# EAGLE board ALL IN ONE (EAGLE 5.01)
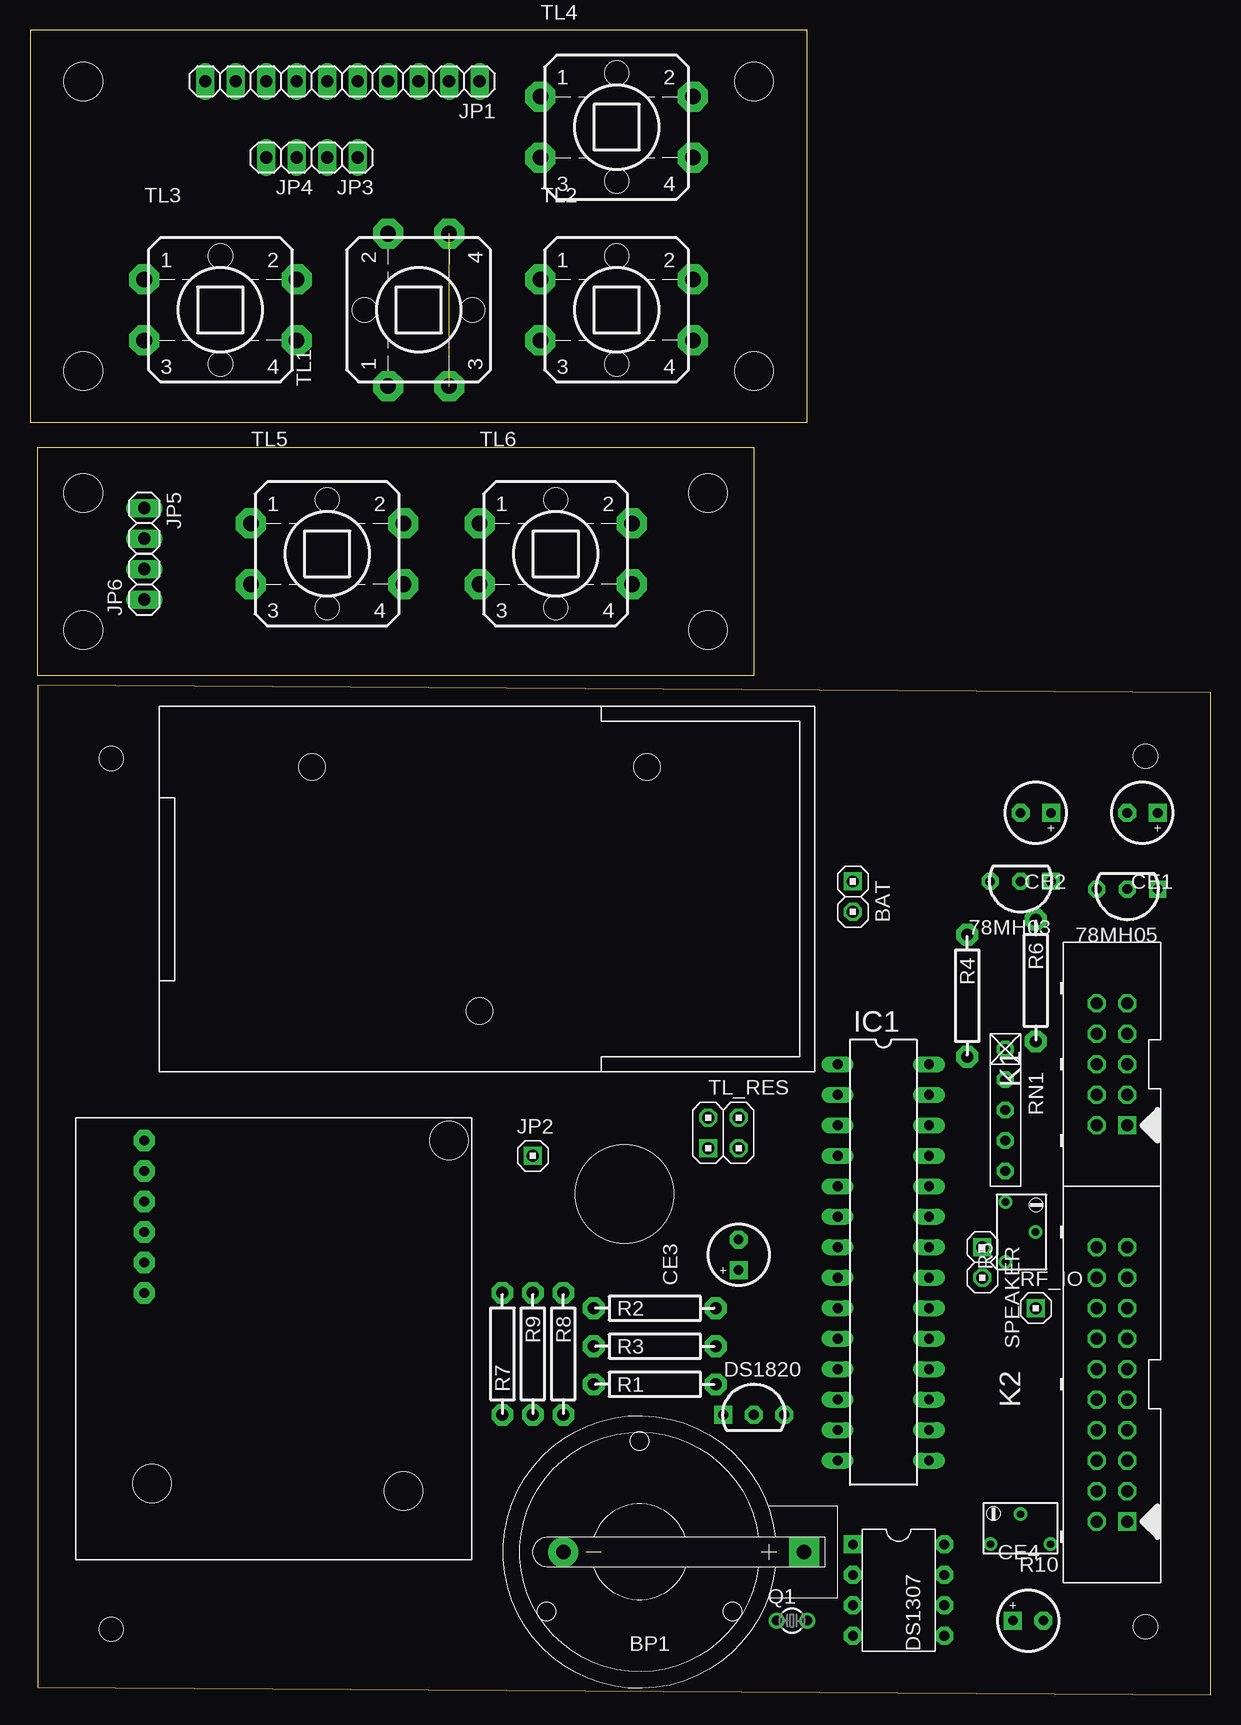
[diagram p0: board, top side]
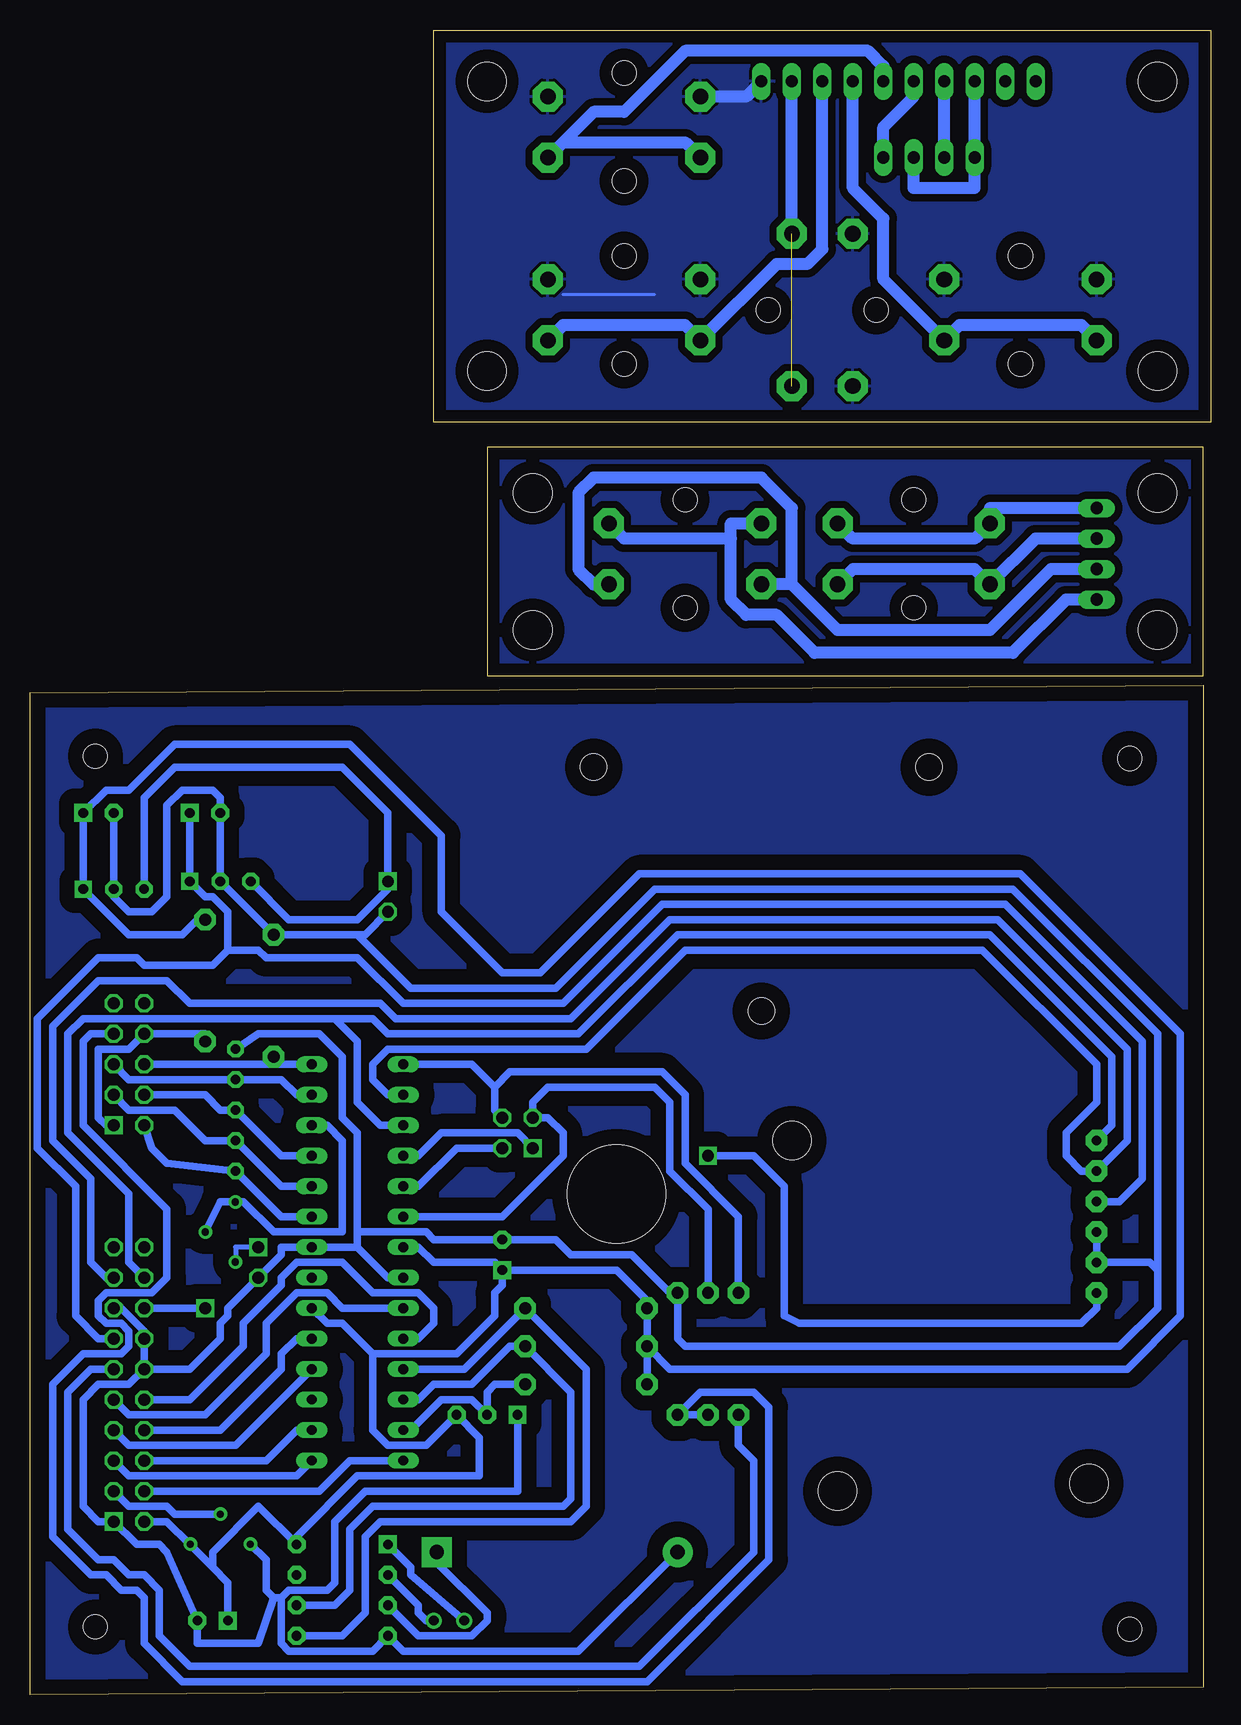
[diagram p1: board, bottom side, seen from below]

Size 98.41 x 138.74 mm. Coordinates in mm from the lower left corner, seen from the top.
Outline: 0.64,0.64 98.41,0 98.41,83.49 0.64,84.12 0.64,0.64
Outline: 0,106.04 64.75,106.04 64.75,138.74 0,138.74 0,106.04
Outline: 0.63,103.97 60.32,103.97 60.32,84.92 0.63,84.92 0.63,103.97
Copper layers (1*16): Top 0.035mm / dielectric 1.5mm / Bottom 0.035mm
Design rules "default": minimum track width 10mil, minimum drill 24mil, track to track 8mil, track to pad 8mil, pad to pad 8mil, via to via 8mil, smd to smd 8mil, copper to edge 40mil, drill to drill 8mil, minimum pad ring 10mil, minimum via ring 8mil, stop-mask expansion 4mil, vias tented up to drill 0mil, thermal gap 10mil
Net classes: 0 default: width 1 mm
Holes 8.2 mm at 49.52,41.74
Holes 2 mm at 6.76,5.47 6.76,78.02 92.97,5.67 92.97,78.22
Holes 3.2 mm at 4.44,110.32 4.44,134.46 60.32,134.46 60.32,110.32 4.44,100.16 4.44,88.73 56.51,100.16 56.51,88.73

## Footprints (pad centres in the part's own frame; a part is rotated, then mirrored left to right if it is on the bottom)
TO-92B = drill 0.813 pad 1.422 square: 1 -2.54,0 | drill 0.813 pad 1.422 octagon: 2 0,0; 3 2.54,0
1X02 = drill 0.991 pad 1.499 square: 1 -1.27,0 | drill 0.991 pad 1.499 octagon: 2 1.27,0
B_BH2032 = drill 1.2 pad 2.5 square: B+ -13.716,0 | drill 1.2 pad 2.5 round: B- 6.35,0
CR05_2,5 = drill 0.813 pad 1.499 square: 1 -1.27,0 | drill 0.813 pad 1.499 octagon: 2 1.27,0
DIL-08 = drill 0.813 pad 1.499 square: 1 -3.81,-3.81 | drill 0.813 pad 1.499 octagon: 2 -1.27,-3.81; 3 1.27,-3.81; 4 3.81,-3.81; 5 3.81,3.81; 6 1.27,3.81; 7 -1.27,3.81; 8 -3.81,3.81
TO-92B' = drill 0.813 pad 1.499 square: 1 -2.54,0 | drill 0.813 pad 1.499 octagon: 2 0,0; 3 2.54,0
DIL28-3 = drill 0.813 long: 1 -16.51,-3.81; 2 -13.97,-3.81; 3 -11.43,-3.81; 4 -8.89,-3.81; 5 -6.35,-3.81; 6 -3.81,-3.81; 7 -1.27,-3.81; 8 1.27,-3.81; 9 3.81,-3.81; 10 6.35,-3.81; 11 8.89,-3.81; 12 11.43,-3.81; 13 13.97,-3.81; 14 16.51,-3.81; 15 16.51,3.81; 16 13.97,3.81; 17 11.43,3.81; 18 8.89,3.81; 19 6.35,3.81; 20 3.81,3.81; 21 1.27,3.81; 22 -1.27,3.81; 23 -3.81,3.81; 24 -6.35,3.81; 25 -8.89,3.81; 26 -11.43,3.81; 27 -13.97,3.81; 28 -16.51,3.81
1X10 = drill 1.016 long: 1 -11.43,0; 2 -8.89,0; 3 -6.35,0; 4 -3.81,0; 5 -1.27,0; 6 1.27,0; 7 3.81,0; 8 6.35,0; 9 8.89,0; 10 11.43,0
1X01 = drill 0.991 pad 1.499 square: 1 0,0
1X02' = drill 1.016 long: 1 -1.27,0; 2 1.27,0
LH-10 = drill 0.991 pad 1.499 square: 1 -5.08,-1.27 | drill 0.991 pad 1.499 octagon: 2 -5.08,1.27; 3 -2.54,-1.27; 4 -2.54,1.27; 5 0,-1.27; 6 0,1.27; 7 2.54,-1.27; 8 2.54,1.27; 9 5.08,-1.27; 10 5.08,1.27
LH-20 = drill 1 pad 1.499 square: 1 -11.43,-1.27 | drill 1 pad 1.499 octagon: 2 -11.43,1.27; 3 -8.89,-1.27; 4 -8.89,1.27; 5 -6.35,-1.27; 6 -6.35,1.27; 7 -3.81,-1.27; 8 -3.81,1.27; 9 -1.27,-1.27; 10 -1.27,1.27; 11 1.27,-1.27; 12 1.27,1.27; 13 3.81,-1.27; 14 3.81,1.27; 15 6.35,-1.27; 16 6.35,1.27; 17 8.89,-1.27; 18 8.89,1.27; 19 11.43,-1.27; 20 11.43,1.27
TC26V = drill 0.813 round: 1 -1.27,0; 2 1.27,0
R2_10S = drill 0.991 pad 1.803 octagon: 1 -5.08,0; 2 5.08,0
RTRIM74W = drill 0.61 round: 1 -1.25,-2.5; 2 1.25,0; 3 -1.25,2.5
RN-5 = drill 0.813 pad 1.397 octagon: 1 -5.08,0; 2 -2.54,0; 3 0,0; 4 2.54,0; 5 5.08,0
TL-BOPLA = drill 1.3 pad 2.5 octagon: 1 -6.35,2.54; 2 6.35,2.54; 3 -6.35,-2.54; 4 6.35,-2.54 | hole 2: 0,4.5; 0,-4.5
2X02 = drill 0.991 pad 1.499 square: 1 -1.27,-1.27 | drill 0.991 pad 1.499 octagon: 2 -1.27,1.27; 3 1.27,-1.27; 4 1.27,1.27
BAT = hole 2.2: 26.67,5.08; 12.7,25.4; 40.64,25.4
BT_PL = drill 0.8 pad 1.778 octagon: 1 14.605,5.715; 2 12.065,5.715; 3 9.525,5.715; 4 6.985,5.715; 5 4.445,5.715; 6 1.905,5.715 | hole 3.2: 1.905,31.115; 30.48,6.35; 31.115,27.305

## Placement (x,y rotation side)
78MH03  [TO-92B]  82.55,67.78 180 top
78MH05  [TO-92B]  91.44,67.14 180 top
BAT  [1X02]  68.58,66.51 270 top
BP1  [B_BH2032]  50.79,11.9 180 top
CE1  [CR05_2,5]  92.7,73.49 180 top
CE2  [CR05_2,5]  83.81,73.49 180 top
CE3  [CR05_2,5]  59.05,36.66 90 top
CE4  [CR05_2,5]  83.18,6.18 0 top
DS1307  DS1307  [DIL-08]  72.39,8.73 270 top
DS1820  DS1820  [TO-92B']  60.32,23.33 0 top
IC1  MEGA8-P  [DIL28-3]  71.12,36.03 270 top
JP1  [1X10]  26.03,134.46 180 top
JP2  [1X01]  41.9,44.92 0 top
JP3  [1X02']  26.03,128.11 180 top
JP4  [1X02']  20.95,128.11 180 top
JP5  [1X02']  9.52,97.62 270 top
JP6  [1X02']  9.52,92.54 90 top
K1  [LH-10]  90.17,52.54 90 top
K2  [LH-20]  90.17,25.87 90 top
Q1  [TC26V]  63.49,6.18 0 top
R1  [R2_10S]  52.06,25.87 0 top
R2  [R2_10S]  52.06,32.22 0 top
R3  [R2_10S]  52.06,29.05 0 top
R4  [R2_10S]  78.1,58.26 270 top
R5  [RTRIM74W]  82.55,38.57 0 top
R6  [R2_10S]  83.81,59.52 270 top
R7  [R2_10S]  39.36,28.41 90 top
R8  [R2_10S]  44.45,28.41 270 top
R9  [R2_10S]  41.9,28.41 270 top
R10  [RTRIM74W]  82.55,13.81 90 top
RF_IO  [1X01]  83.81,32.22 0 top
RN1  [RN-5]  81.28,48.73 270 top
SPEAKER  [1X02]  79.37,36.03 270 top
TL1  [TL-BOPLA]  32.38,115.4 90 top
TL2  [TL-BOPLA]  48.89,115.4 0 top
TL3  [TL-BOPLA]  15.87,115.4 0 top
TL4  [TL-BOPLA]  48.89,130.65 0 top
TL5  [TL-BOPLA]  24.76,95.08 0 top
TL6  [TL-BOPLA]  43.81,95.08 0 top
TL_RES  [2X02]  57.78,46.83 0 top
U$10  BAT  [BAT]  10.79,51.91 0 top
U$11  BT_PL  [BT_PL]  3.81,48.09 270 top

## Library data of the parts
78MH03 78MH05 = !LINEAR
BAT JP2 K1 K2 RF_IO SPEAKER TL_RES = !PINHEAD
BP1 TL1-TL6 = !ELMECH
CE1-CE4 R1-R4 R6-R9 RN1 = !DISCRET
DS1307 DS1820 U$10 U$11 = _dallas
IC1 = atmel
JP1 JP3-JP6 = pinhead
Q1 = crystal
R5 R10 = rcl

## Nets
+: BP1.B+ DS1307.3
GND: 78MH03.2 78MH05.2 BAT.2 BP1.B- CE1.2 CE2.2 CE3.2 CE4.2 DS1307.4 DS1820.1 IC1.8 IC1.22 K2.1 K2.12 K2.14 K2.15 R4.1 R8.1 R10.3 RN1.1 SPEAKER.2 U$11.2 U$11.3
N$1: 78MH03.3 78MH05.3 BAT.1
N$3: IC1.26 R5.2 R5.3
N$4: 78MH03.1 CE2.1 K2.13 U$11.4
N$5: DS1820.2 IC1.13 R1.2
N$6: K1.7 R8.2 R9.2
N$7: K2.3 R10.2
N$8: IC1.1 R7.2 TL_RES.4
N$9: DS1307.1 Q1.1
N$10: DS1307.2 Q1.2
N$11: K2.11 R7.1
N$12: K1.1 K1.8 R6.2
N$13: DS1307.6 IC1.12 R3.2
N$14: DS1307.5 IC1.11 R2.2
N$15: K2.16 RF_IO.1
N$16: IC1.2 K2.17 U$11.5
N$17: IC1.3 K2.18 U$11.6
N$18: IC1.6 R9.1 TL_RES.2
N$19: JP1.1 TL1.1 TL1.2 TL2.1 TL2.2 TL3.1 TL3.2 TL4.1 TL4.2
N$20: R5.1 SPEAKER.1
N$21: IC1.4 TL_RES.1
N$22: JP2.1 U$11.1
N$23: IC1.5 TL_RES.3
N$24: JP1.2 TL1.3 TL1.4
N$25: JP1.3 TL2.3 TL2.4
N$26: JP1.4 TL3.3 TL3.4
N$27: JP1.5 TL4.3 TL4.4
N$28: JP1.6 JP3.1
N$29: JP1.7 JP4.1
N$30: JP1.8 JP3.2 JP4.2
N$31: JP5.1 TL5.1 TL5.2
N$32: JP5.2 TL5.3 TL5.4
N$33: JP6.1 TL6.1 TL6.2
N$34: JP6.2 TL6.3 TL6.4
PB0: IC1.14 K2.4
PB1: IC1.15 K2.5
PB2: IC1.16 K2.6
PB4: IC1.18 K2.7
PB5: IC1.19 K2.8
PB6: IC1.9 K2.9
PB7: IC1.10 K2.10
PC0: IC1.23 K1.2 RN1.5
PC1: IC1.24 K1.3 RN1.4
PC2: IC1.25 K1.4 RN1.3
PC4: IC1.27 K1.5 RN1.2
PC5: IC1.28 K1.6 R4.2
VCC: 78MH05.1 CE1.1 CE3.1 CE4.1 DS1307.8 DS1820.3 IC1.7 IC1.20 K2.2 R1.1 R2.1 R3.1 R6.1 R10.1

## Tracks (layer width: path | path; a pad name or v marks a point on that pad's centre or on a via)
+
  Bottom 0.61: DS1307.3 66.04,4.92 61.59,4.92 60.32,6.18 60.32,6.82 64.51,11.01 BP1.B+
GND
  Bottom 0.61: IC1.8 68.58,34.76 71.12,37.3 | 71.12,37.3 IC1.22 76.2,37.3 | K2.12 90.17,25.87 92.7,25.87 93.98,24.6 93.98,15.71 92.7,14.44 K2.1 89.53,12.54 87.62,12.54 86.99,11.9 CE4.2 84.45,4.28 79.37,4.28 78.1,8.09 | K2.12 85.09,27.14 82.55,29.68 82.55,30.95 81.91,31.59 81.91,32.22 SPEAKER.2 77.47,36.66 77.47,37.3 76.2,37.3 | K2.12 K2.14 88.9,30.32 90.8,32.22 K2.15 | 76.2,37.3 73.66,37.3 | 71.12,38.57 71.12,37.3 | 71.12,38.57 71.12,46.83 72.39,48.09 72.39,53.18 74.29,55.08 79.37,55.08 RN1.1 | 71.12,38.57 65.4,38.57 64.77,37.94 CE3.2 54.6,37.94 53.34,36.66 48.25,36.66 45.08,33.49 | DS1820.1 57.78,16.98 70.48,16.98 73.02,14.44 73.02,9.36 73.66,8.73 76.83,8.73 77.47,8.09 | CE1.2 78MH05.2 91.44,66.51 90.17,65.24 88.26,65.24 86.99,66.51 86.99,74.13 85.72,75.4 83.18,75.4 82.55,74.77 CE2.2 78MH03.2 R4.1 71.12,63.34 | 71.12,63.34 66.67,58.89 54.6,58.89 46.35,67.14 16.51,67.14 4.44,55.08 4.44,35.4 | 4.44,35.4 4.44,32.22 7.62,29.05 43.81,29.05 44.45,29.68 44.45,32.86 45.08,33.49 | U$11.3 U$11.2 5.08,36.03 4.44,35.4 | 71.12,63.34 70.48,63.34 BAT.2 | 77.47,8.09 77.47,4.28 76.83,3.65 69.84,3.65 DS1307.4 67.31,3.65 52.7,3.65 BP1.B- | R10.3 78.73,11.25 78.73,8.73 78.1,8.09 | 78.1,8.09 77.47,8.09 | 45.08,33.49 R8.1
N$1
  Bottom 0.61: 78MH05.3 88.9,74.77 86.36,77.3 72.39,77.3 68.58,73.49 BAT.1 68.58,67.14 71.12,64.6 76.83,64.6 78MH03.3
N$2
  pour Bottom (isolate 1.27): 0.63,83.65 98.42,83.65 98.42,-0.17 0.63,-0.17
N$3
  Bottom 0.61: IC1.26 73.66,47.46 72.39,46.19 72.39,38.57 78.1,38.57 80.64,41.11 81.28,41.11 82.56,41.09 | 82.56,41.09 R5.3 | R5.2 83.8,38.59 82.56,41.09
N$4
  Bottom 0.61: K2.13 92.7,29.68 94.61,31.59 94.61,42.38 97.79,45.55 97.79,56.35 92.7,61.43 89.53,61.43 88.9,60.8 83.18,60.8 81.91,62.06 | CE2.1 78MH03.1 83.81,66.51 83.18,66.51 81.91,65.24 81.91,62.06 | 81.91,62.06 79.37,62.06 78.73,61.43 71.12,61.43 67.31,57.62 53.97,57.62 45.71,65.88 17.14,65.88 5.71,54.45 5.71,43.02 7.62,41.11 U$11.4
N$5
  Bottom 0.61: R1.2 59.68,25.87 60.32,25.23 DS1820.2 61.59,24.6 64.13,24.6 66.67,22.06 IC1.13
N$6
  Bottom 0.61: R9.2 R8.2 42.54,25.23 38.09,25.23 36.82,23.96 36.82,11.27 46.98,1.1 85.72,1.1 88.9,4.28 88.9,8.09 89.53,8.73 90.8,8.73 92.07,10 93.34,10 96.52,13.17 96.52,25.87 93.98,28.41 90.8,28.41 90.17,29.05 90.17,30.32 90.8,30.95 92.07,30.95 92.7,31.59 92.7,32.86 92.07,33.49 88.26,33.49 86.99,34.76 86.99,40.48 93.98,47.46 93.98,54.45 93.34,55.08 K1.7
N$7
  Bottom 0.61: K2.3 90.17,15.71 86.99,15.71 86.34,15.06 R10.2
N$8
  Bottom 0.61: IC1.1 61.59,52.54 59.68,50.63 | TL_RES.4 59.68,48.73 59.68,50.63 | 59.68,50.63 58.41,51.91 45.71,51.91 43.81,50 43.81,44.29 39.36,39.84 R7.2
N$9
  Bottom 0.61: DS1307.1 66.67,10.63 66.67,10 Q1.1
N$10
  Bottom 0.61: DS1307.2 66.04,7.46 66.04,6.82 65.4,6.18 Q1.2
N$11
  Bottom 0.61: K2.11 93.34,27.14 95.25,25.23 95.25,13.81 92.7,11.27 91.44,11.27 90.17,10 88.9,10 87.62,8.73 87.62,4.92 85.09,2.38 47.62,2.38 38.09,11.9 38.09,19.52 39.36,20.79 R7.1
N$12
  Bottom 0.61: R6.2 83.81,55.08 K1.8 90.17,53.81 92.7,53.81 92.7,48.09 92.07,47.46 K1.1
N$13
  Bottom 0.61: IC1.12 66.04,24.6 64.77,25.87 61.59,25.87 58.41,29.05 R3.2 53.34,25.23 53.34,16.35 53.97,15.71 69.84,15.71 71.75,13.81 71.75,8.73 73.02,7.46 DS1307.6
N$14
  Bottom 0.61: IC1.11 62.22,27.14 R2.2 52.06,27.14 52.06,15.71 53.34,14.44 69.21,14.44 70.48,13.17 70.48,6.82 72.39,4.92 DS1307.5
N$15
  Bottom 0.61: RF_IO.1 K2.16
N$16
  Bottom 0.61: IC1.2 68.58,50 69.84,51.27 69.84,52.54 68.58,53.81 52.06,53.81 43.81,62.06 19.05,62.06 9.52,52.54 9.52,49.37 12.06,46.83 12.06,44.92 10.79,43.65 U$11.5 6.98,46.19 6.98,53.81 17.78,64.6 45.08,64.6 53.34,56.35 67.94,56.35 69.21,57.62 85.09,57.62 86.99,59.52 92.7,59.52 96.52,55.72 96.52,46.19 93.34,43.02 93.34,36.03 92.07,34.76 K2.17
N$17
  Bottom 0.61: IC1.3 69.21,47.46 71.12,49.37 71.12,54.45 73.02,56.35 | K2.18 90.17,36.03 90.17,41.74 95.25,46.83 95.25,55.08 93.98,56.35 73.02,56.35 | 73.02,56.35 69.84,56.35 68.58,55.08 52.7,55.08 44.45,63.34 18.41,63.34 8.25,53.18 8.25,47.46 U$11.6
N$18
  Bottom 0.61: IC1.6 59.05,39.84 53.97,44.92 53.97,46.83 55.24,48.09 TL_RES.2 56.51,49.37 55.24,50.63 46.35,50.63 45.08,49.37 45.08,43.65 41.9,40.48 R9.1
N$19
  Bottom 0.254: 46.35,116.67 53.97,116.67
  Bottom 1.016: JP1.1 38.73,133.19 TL4.1
  pour Bottom (isolate 0.61): -0.64,138.27 -0.64,139.53 65.4,139.53 65.4,105.24 -0.64,105.24
N$20
  Bottom 0.406: SPEAKER.1 81.28,37.3 81.28,36.07 | 81.28,36.07 81.28,36.03 | 81.28,36.07 R5.1
N$21
  Bottom 0.61: TL_RES.1 57.78,46.83 64.13,46.83 66.04,44.92 IC1.4
N$22
  Bottom 0.61: U$11.1 9.52,32.22 10.79,30.95 34.28,30.95 35.55,31.59 35.55,42.38 38.09,44.92 JP2.1
N$23
  Bottom 0.61: IC1.5 66.04,42.38 62.86,45.55 TL_RES.3
N$24  (1 unrouted)
  Bottom 1.016: TL1.4 JP1.2
N$25
  Bottom 1.016: JP1.3 32.38,120.48 33.65,119.21 36.19,119.21 TL2.3 43.81,114.13 53.97,114.13 TL2.4
N$26
  Bottom 1.016: JP1.4 29.84,125.56 27.3,123.02 27.3,117.94 TL3.4 20.95,114.13 10.79,114.13 TL3.3
N$27
  Bottom 1.016: 53.97,129.38 51.43,131.92 48.89,131.92 43.81,137 28.57,137 27.3,135.72 JP1.5 | 53.97,129.38 TL4.4 | TL4.3 43.81,129.38 53.97,129.38
N$28
  Bottom 1.016: JP3.1 27.3,130.65 24.76,133.19 JP1.6
N$29
  Bottom 1.016: JP4.1 JP1.7
N$30
  Bottom 1.016: JP1.8 JP4.2 19.68,125.56 24.76,125.56 JP3.2
N$31
  Bottom 1.016: JP5.1 18.41,98.89 TL5.1 19.68,96.35 29.84,96.35 TL5.2
N$32
  Bottom 1.016: JP5.2 14.6,96.35 TL5.3 19.68,93.81 29.84,93.81 TL5.4
N$33
  Bottom 1.016: JP6.1 12.06,91.27 16.51,86.83 33.02,86.83 36.19,90 38.73,90 40,91.27 40,96.35 | 40,96.35 40,97.62 TL6.1 | TL6.2 48.89,96.35 40,96.35
N$34
  Bottom 1.016: JP6.2 13.33,93.81 18.41,88.73 31.11,88.73 34.92,92.54 | 34.92,92.54 TL6.3 | 34.92,92.54 34.92,98.89 37.46,101.43 51.43,101.43 52.7,100.16 52.7,93.81 51.43,92.54 TL6.4
N$35
  pour Bottom (isolate 0.61): 0.63,103.97 60.32,103.97 60.32,84.92 0.63,84.92
PB0
  Bottom 0.61: IC1.14 71.75,19.52 74.29,16.98 K2.4
PB1
  Bottom 0.61: IC1.15 76.2,18.25 90.17,18.25 K2.5
PB2
  Bottom 0.61: K2.6 78.73,19.52 76.2,22.06 IC1.16
PB4
  Bottom 0.61: IC1.18 81.28,20.79 90.17,20.79 K2.7
PB5
  Bottom 0.61: K2.8 82.55,22.06 77.47,27.14 77.47,28.41 76.2,29.68 IC1.19
PB6
  Bottom 0.61: IC1.9 72.39,32.22 73.66,33.49 76.2,33.49 78.73,30.95 78.73,28.41 83.81,23.33 90.17,23.33 K2.9
PB7
  Bottom 0.61: K2.10 85.09,24.6 80.64,29.05 80.64,30.95 77.47,34.12 77.47,34.76 76.2,36.03 72.39,36.03 69.84,33.49 66.04,33.49 64.77,32.22 64.77,30.95 66.04,29.68 IC1.10
PC0
  Bottom 0.61: IC1.23 77.47,39.84 RN1.5 86.99,44.29 88.26,45.55 K1.2
PC1
  Bottom 0.61: IC1.24 77.47,42.38 RN1.4 83.81,46.19 86.36,48.73 90.17,48.73 K1.3
PC2
  Bottom 0.61: IC1.25 77.47,44.92 RN1.3 82.55,48.73 83.81,50 K1.4
PC4
  Bottom 0.61: IC1.27 76.2,50 77.47,51.27 RN1.2 90.17,51.27 K1.5
PC5
  Bottom 0.61: IC1.28 78.1,52.54 | 78.1,52.54 K1.6 | 78.1,52.54 R4.2
VCC
  Bottom 0.61: IC1.20 73.66,30.95 72.39,30.95 69.84,28.41 | 69.84,28.41 69.84,22.06 68.58,20.79 65.4,20.79 DS1820.3 60.95,21.43 60.95,18.25 71.12,18.25 76.2,13.17 DS1307.8 79.37,15.71 83.18,11.9 83.18,10.63 | CE3.1 59.05,34.12 59.68,33.49 59.68,31.59 62.86,28.41 69.84,28.41 | CE3.1 49.52,35.4 46.98,32.86 R2.1 R3.1 | 83.18,10.63 81.91,9.36 CE4.1 | R3.1 R1.1 | R6.1 84.45,64.6 85.72,63.34 90.17,63.34 78MH05.1 CE1.1 92.07,75.4 90.17,75.4 86.36,79.21 71.75,79.21 64.13,71.59 64.13,65.24 59.05,60.16 55.88,60.16 47.62,68.41 15.87,68.41 2.54,55.08 2.54,31.59 6.98,27.14 45.08,27.14 R3.1 | IC1.7 66.04,37.3 64.77,36.03 59.68,36.03 CE3.1 | 83.18,10.63 85.09,12.54 | 85.09,12.54 85.06,12.56 R10.1 | K2.2 86.99,14.44 85.09,12.54